# EAGLE board ATMega328-1.0 (EAGLE 6.4)
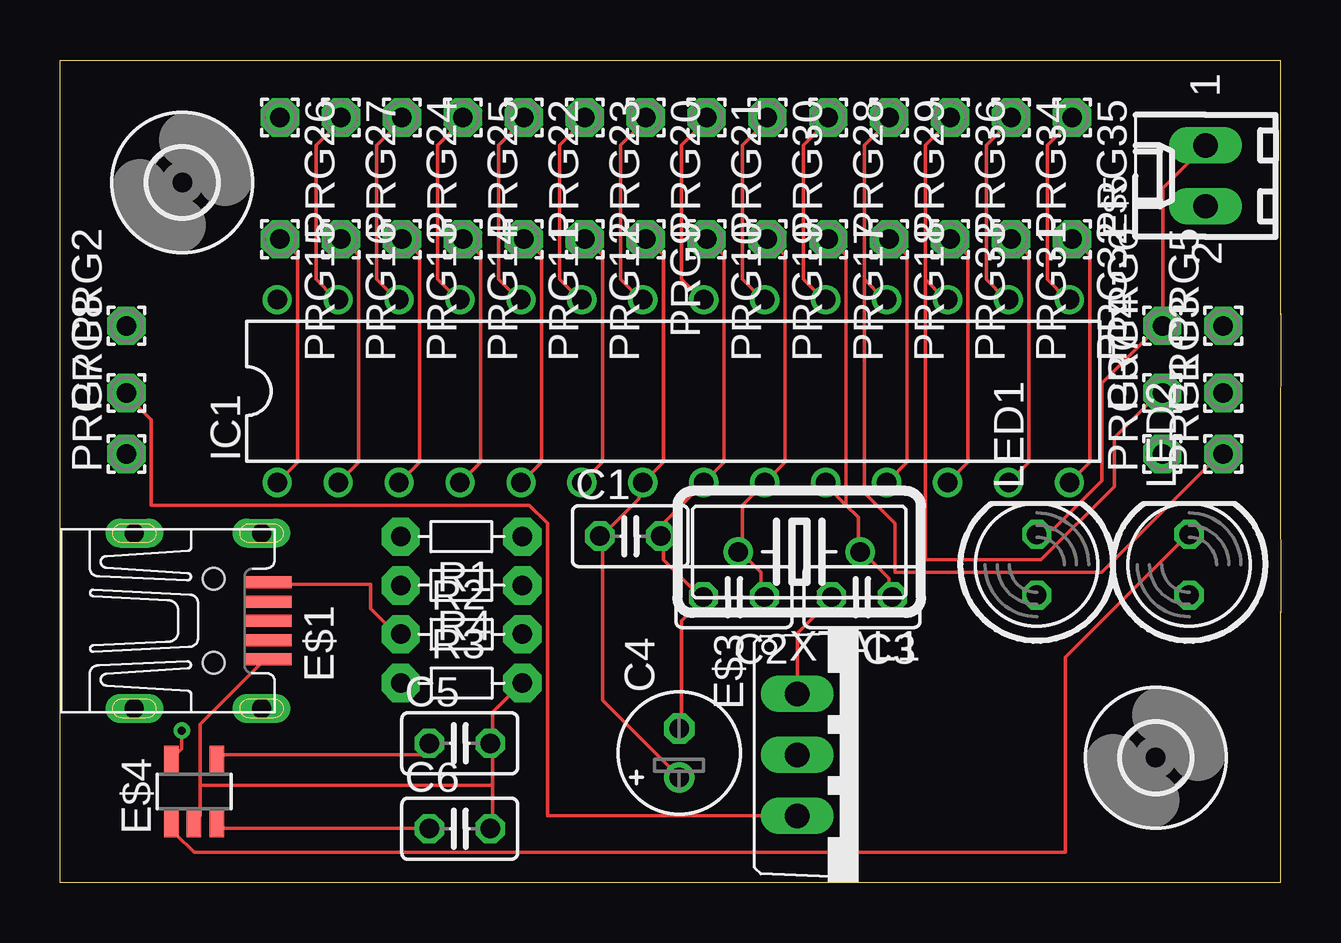
[diagram p0: board, top side]
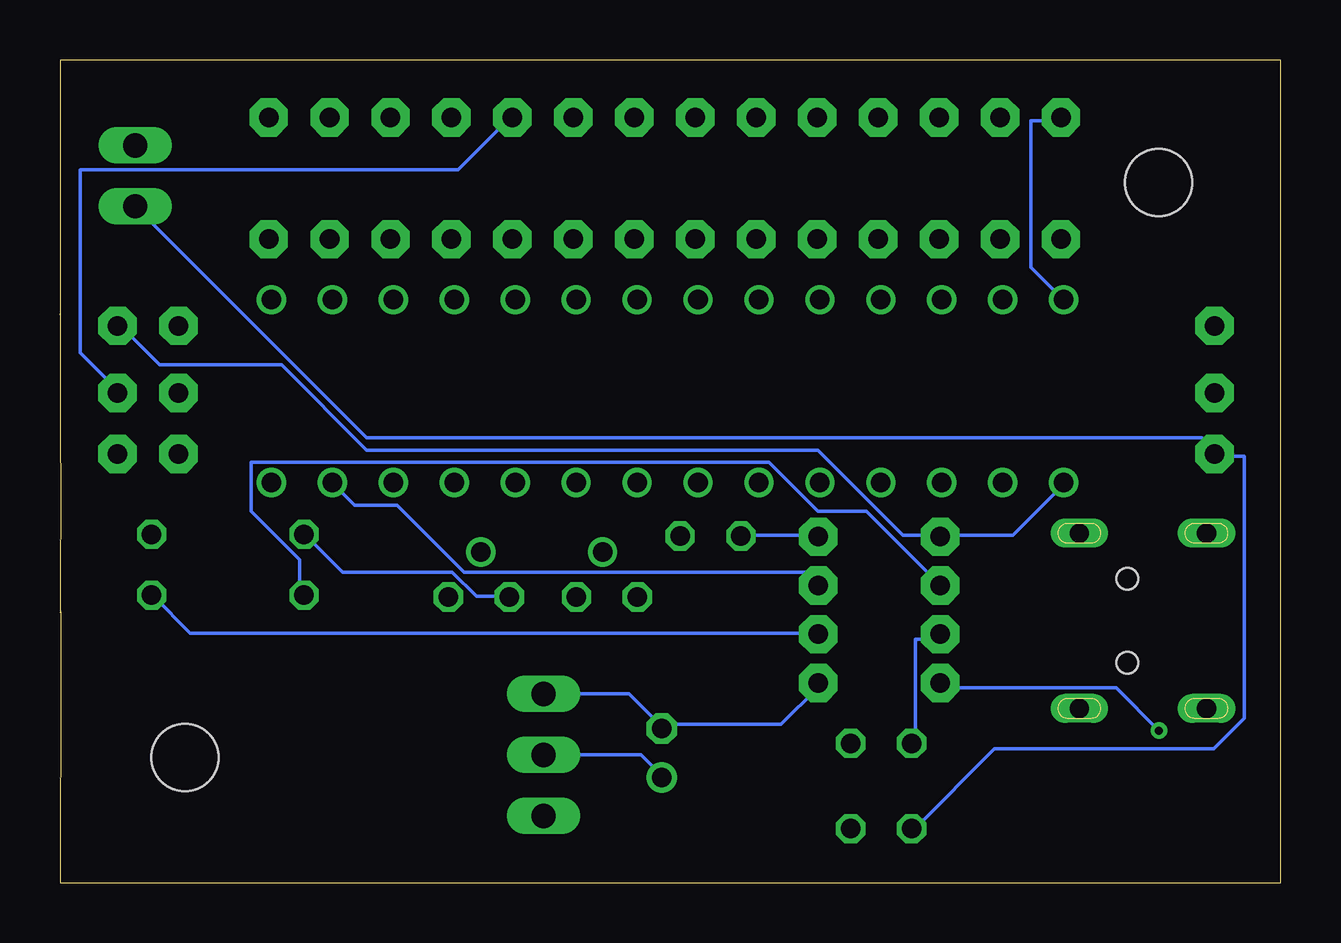
[diagram p1: board, bottom side, seen from below]

Size 50.89 x 34.29 mm. Coordinates in mm from the lower left corner, seen from the top.
Outline: 0,0 0,20.43 0.01,20.46 0.01,22.51 0,23.6 0,34.29 50.87,34.29 50.87,23.67 50.88,23.72 50.89,20.7 50.87,20.66 50.86,14.34 50.88,14.29 50.88,11.25 50.86,11.3 50.86,8.78 50.87,0 0,0
Copper layers (1*16): Top 0.0356mm / dielectric 1.5011mm / Bottom 0.0356mm
Design rules "LaenPCBOrder": minimum track width 6mil, minimum drill 13mil, track to track 6mil, track to pad 6mil, pad to pad 6mil, via to via 6mil, smd to smd 6mil, copper to edge 15mil, drill to drill 6mil, minimum pad ring 7mil, minimum via ring 7mil, stop-mask expansion 4mil, vias tented up to drill 0mil, thermal gap 10mil

## Footprints (pad centres in the part's own frame; a part is rotated, then mirrored left to right if it is on the bottom)
C025-025X050 = drill 0.813 octagon: 1 -1.27,0; 2 1.27,0
E2-5 = drill 0.813 pad 1.27: + -1.016,0 | drill 0.813 pad 1.27 octagon: - 1.016,0
UX60-MB-5S8 = smd 2 x 0.5: 1 8.65,1.6; 2 8.65,0.8; 3 8.65,0; 4 8.65,-0.8; 5 8.65,-1.6 | drill 0.8 long: M1 3.1,-3.65; M2 3.1,3.65; M3 8.4,3.65; M4 8.4,-3.65 | hole 0.9: 6.4,-1.75; 6.4,1.75
2,8 = hole 2.8: 0,0
TO220V = drill 1.016 long: 1 -2.54,-2.54; 2 0,-2.54; 3 2.54,-2.54
SOT23-5 = smd 0.6 x 1.2: 1 -0.95,-1.306; 2 0,-1.306; 3 0.95,-1.306; 4 0.95,1.306; 5 -0.95,1.306
6410-02 = drill 1.016 long: 1 1.27,0; 2 -1.27,0
PDIP-T28 = drill 0.813 pad 1.2: 1 -16.51,-3.81; 2 -13.97,-3.81; 3 -11.43,-3.81; 4 -8.89,-3.81; 5 -6.35,-3.81; 6 -3.81,-3.81; 7 -1.27,-3.81; 8 1.27,-3.81; 9 3.81,-3.81; 10 6.35,-3.81; 11 8.89,-3.81; 12 11.43,-3.81; 13 13.97,-3.81; 14 16.51,-3.81; 15 16.51,3.81; 16 13.97,3.81; 17 11.43,3.81; 18 8.89,3.81; 19 6.35,3.81; 20 3.81,3.81; 21 1.27,3.81; 22 -1.27,3.81; 23 -3.81,3.81; 24 -6.35,3.81; 25 -8.89,3.81; 26 -11.43,3.81; 27 -13.97,3.81; 28 -16.51,3.81
LED5MM = drill 0.813 octagon: A -1.27,0; K 1.27,0
1,6/0,8 = drill 0.813 pad 1.6 octagon: 1 0,0
R-5 = drill 0.813 pad 1.6 octagon: 1 -2.54,0; 2 2.54,0
HC18U-V = drill 0.813: 1 -2.54,0; 2 2.54,0

## Placement (x,y rotation side)
C1  [C025-025X050]  23.77,14.45 0 top
C2  [C025-025X050]  28.09,11.91 180 top
C3  [C025-025X050]  33.43,11.91 180 top
C4  [E2-5]  25.81,5.41 90 top
C5  [C025-025X050]  16.66,5.82 0 top
C6  [C025-025X050]  16.66,2.26 0 top
E$1  [UX60-MB-5S8]  0,10.92 0 top
E$2  [2,8]  5.1,29.18 0 top
E$3  [TO220V]  33.27,5.33 270 top
E$4  [SOT23-5]  5.59,3.81 0 top
E$5  [6410-02]  47.75,29.46 90 top
E$14  [2,8]  45.68,5.22 0 top
IC1  [PDIP-T28]  25.57,20.49 0 top
LED1  [LED5MM]  40.72,13.26 90 top
LED2  [LED5MM]  47.07,13.26 90 top
PRG1  [1,6/0,8]  48.49,17.88 90 top
PRG2  [1,6/0,8]  2.77,23.22 90 top
PRG3  [1,6/0,8]  48.49,20.42 90 top
PRG4  [1,6/0,8]  45.95,20.42 90 top
PRG5  [1,6/0,8]  48.49,23.22 90 top
PRG6  [1,6/0,8]  45.95,23.22 90 top
PRG7  [1,6/0,8]  2.77,17.88 90 top
PRG8  [1,6/0,8]  2.77,20.42 90 top
PRG9  [1,6/0,8]  24.41,26.82 270 top
PRG10  [1,6/0,8]  26.95,26.82 270 top
PRG11  [1,6/0,8]  19.33,26.82 270 top
PRG12  [1,6/0,8]  21.87,26.82 270 top
PRG13  [1,6/0,8]  14.25,26.82 270 top
PRG14  [1,6/0,8]  16.79,26.82 270 top
PRG15  [1,6/0,8]  9.17,26.82 270 top
PRG16  [1,6/0,8]  11.71,26.82 270 top
PRG17  [1,6/0,8]  32.03,26.82 270 top
PRG18  [1,6/0,8]  34.57,26.82 270 top
PRG19  [1,6/0,8]  29.49,26.82 270 top
PRG20  [1,6/0,8]  24.41,31.9 270 top
PRG21  [1,6/0,8]  26.95,31.9 270 top
PRG22  [1,6/0,8]  19.33,31.9 270 top
PRG23  [1,6/0,8]  21.87,31.9 270 top
PRG24  [1,6/0,8]  14.25,31.9 270 top
PRG25  [1,6/0,8]  16.79,31.9 270 top
PRG26  [1,6/0,8]  9.17,31.9 270 top
PRG27  [1,6/0,8]  11.71,31.9 270 top
PRG28  [1,6/0,8]  32.03,31.9 270 top
PRG29  [1,6/0,8]  34.57,31.9 270 top
PRG30  [1,6/0,8]  29.49,31.9 270 top
PRG31  [1,6/0,8]  39.65,26.82 270 top
PRG32  [1,6/0,8]  42.19,26.82 270 top
PRG33  [1,6/0,8]  37.11,26.82 270 top
PRG34  [1,6/0,8]  39.65,31.9 270 top
PRG35  [1,6/0,8]  42.19,31.9 270 top
PRG36  [1,6/0,8]  37.11,31.9 270 top
PRG37  [1,6/0,8]  45.95,17.88 90 top
R1  [R-5]  16.74,14.43 180 top
R2  [R-5]  16.74,10.36 0 top
R3  [R-5]  16.74,8.33 0 top
R4  [R-5]  16.74,12.4 180 top
XTAL1  [HC18U-V]  30.81,13.79 180 top

## Library data of the parts
C1-C3 C5 C6 = resistor
C4 = rcl
E$1 = con-hirose
E$2 E$14 = holes
E$3 E$4 = linear
E$5 = con-molex
IC1 = texas
LED1 LED2 = led
PRG1-PRG37 = wirepad
R1-R4 = discrete
XTAL1 = crystal

## Nets
S$2: C1.2 C2.2 C3.2 C4.- C5.2 C6.2 E$1.5 E$3.1 E$4.2 E$5.1 IC1.8 LED1.K PRG6.1 PRG10.1 R3.2
S$3: E$4.1 LED2.K
S$4: IC1.26 PRG24.1
S$5: IC1.13 PRG31.1 R4.1
S$6: C2.1 IC1.9 PRG19.1 XTAL1.2
S$7: C3.1 IC1.10 PRG17.1 XTAL1.1
S$8: IC1.1 PRG5.1 PRG15.1 R1.2
S$9: IC1.18 PRG1.1 PRG29.1
S$10: C1.1 C4.+ E$3.2 IC1.7 PRG9.1 R1.1
S$11: IC1.15 PRG35.1
S$12: IC1.19 PRG3.1 PRG28.1
S$13: IC1.17 PRG4.1 PRG36.1
S$14: IC1.14 PRG32.1
S$15: IC1.16 PRG34.1
S$16: IC1.4 PRG14.1
S$17: IC1.28 PRG26.1
S$18: IC1.5 PRG11.1
S$19: IC1.27 PRG27.1
S$20: E$3.3 PRG8.1
S$21: IC1.2 PRG16.1
S$22: LED1.A R4.2
S$23: IC1.3 PRG13.1
S$24: IC1.6 PRG12.1
S$25: IC1.11 PRG18.1
S$26: IC1.12 PRG33.1
S$27: IC1.25 PRG25.1
S$28: IC1.24 PRG22.1
S$29: IC1.23 PRG23.1
S$30: IC1.22 PRG20.1
S$31: IC1.21 PRG21.1
S$32: IC1.20 PRG30.1
S$33: LED2.A R2.2
S$34: C6.1 E$4.3 E$5.2 PRG7.1
S$35: C5.1 E$1.1 E$4.4 R2.1
S$36: E$4.5 R3.1

## Tracks (layer width: path | path; a pad name or v marks a point on that pad's centre or on a via)
S$2
  Top 0.152: 5.84,4.06 5.84,6.6 8.64,9.4 E$1.5 | 5.84,4.06 5.84,2.79 5.59,2.54 E$4.2 | 18.03,4.06 18.03,5.59 C5.2 18.03,5.84 18.03,7.11 19.05,8.13 R3.2 | 18.03,4.06 18.03,2.29 C6.2 | 18.03,4.06 5.84,4.06 | PRG10.1 27.18,26.67 27.69,26.16 27.69,17.53 26.92,16.76 IC1.8 26.67,16.51 25.15,14.99 25.15,14.48 C1.2 25.15,14.22 25.15,13.46 26.67,11.94 C2.2 26.67,11.68 25.91,10.92 25.91,6.6 C4.- | E$5.1 45.97,28.96 45.97,23.37 PRG6.1 45.72,23.11 43.43,20.83 43.43,16.76 41.4,14.73 40.89,14.73 LED1.K | E$3.1 30.73,10.41 32,11.68 C3.2
  Bottom 0.152: LED1.K 40.64,14.48 39.12,12.95 34.54,12.95 33.53,11.94 32.26,11.94 C3.2 | E$3.1 27.18,7.87 25.91,6.6 C4.- 25.65,6.6 20.83,6.6 19.3,8.13 R3.2
S$3
  Top 0.152: E$4.1 4.83,2.29 4.83,2.03 5.59,1.27 41.91,1.27 41.91,9.4 46.99,14.48 LED2.K
S$4
  Top 0.152: IC1.26 13.97,24.38 13.21,25.15 13.21,30.73 14.22,31.75 PRG24.1
S$5
  Top 0.152: IC1.13 39.62,16.76 40.39,17.53 40.39,26.16 39.88,26.67 PRG31.1
  Bottom 0.152: R4.1 19.3,12.45 19.81,12.95 34.04,12.95 36.83,15.75 38.61,15.75 39.37,16.51 IC1.13
S$6
  Top 0.152: C2.1 29.21,11.94 29.21,12.95 28.45,13.72 XTAL1.2 28.45,13.97 28.45,15.75 29.21,16.51 IC1.9 29.46,16.76 30.23,17.53 30.23,26.16 29.72,26.67 PRG19.1
S$7
  Top 0.152: C3.1 34.54,11.94 34.54,12.7 33.53,13.72 XTAL1.1 33.27,13.97 33.27,15.24 32.77,15.75 | 32.77,15.75 32,16.51 IC1.10 | 32.77,15.75 32.77,26.16 32.26,26.67 PRG17.1
S$8
  Top 0.152: PRG15.1 9.4,26.67 9.91,26.16 9.91,17.53 9.14,16.76 IC1.1
  Bottom 0.152: IC1.1 9.14,16.51 11.18,14.48 13.97,14.48 R1.2 14.22,14.48 15.75,14.48 19.3,18.03 38.1,18.03 41.66,21.59 46.74,21.59 48.26,23.11 PRG5.1
S$9
  Top 0.152: 33.53,25.15 34.29,24.38 IC1.18 | 33.53,25.15 33.53,30.73 34.54,31.75 PRG29.1 | 33.53,25.15 33.53,16.26 34.8,14.99 34.8,12.95 43.43,12.95 48.26,17.78 PRG1.1
S$10
  Top 0.152: PRG9.1 24.64,26.67 25.15,26.16 25.15,17.53 24.38,16.76 IC1.7 24.13,16.51 24.13,16 22.61,14.48 C1.1 22.61,14.22 22.61,7.62 25.65,4.57 C4.+
  Bottom 0.152: E$3.2 26.67,5.33 25.91,4.57 C4.+ | R1.1 19.3,14.48 22.35,14.48 C1.1
S$11
  Top 0.152: IC1.15 41.91,24.38 41.15,25.15 41.15,30.73 42.16,31.75 PRG35.1
S$12
  Top 0.152: IC1.19 31.75,24.38 30.99,25.15 30.99,30.73 32,31.75 PRG28.1
  Bottom 0.152: PRG3.1 48.51,20.57 50.04,22.1 50.04,29.72 34.29,29.72 32.26,31.75 PRG28.1
S$13
  Top 0.152: 36.07,25.15 36.83,24.38 IC1.17 | 36.07,25.15 36.07,30.73 37.08,31.75 PRG36.1 | 36.07,25.15 36.07,13.46 40.89,13.46 43.94,16.51 43.94,18.54 45.72,20.32 PRG4.1
S$14
  Top 0.152: IC1.14 42.16,16.76 42.93,17.53 42.93,26.16 42.42,26.67 PRG32.1
S$15
  Top 0.152: IC1.16 39.37,24.38 38.61,25.15 38.61,30.73 39.62,31.75 PRG34.1
S$16
  Top 0.152: IC1.4 16.76,16.76 17.53,17.53 17.53,26.16 17.02,26.67 PRG14.1
S$17
  Bottom 0.152: IC1.28 9.14,24.38 10.41,25.65 10.41,31.75 9.4,31.75 PRG26.1
S$18
  Top 0.152: IC1.5 19.3,16.76 20.07,17.53 20.07,26.16 19.56,26.67 PRG11.1
S$19
  Top 0.152: IC1.27 11.43,24.38 10.67,25.15 10.67,30.73 11.68,31.75 PRG27.1
S$20
  Top 0.152: E$3.3 20.32,2.79 20.32,14.99 19.56,15.75 3.81,15.75 3.81,19.3 2.79,20.32 PRG8.1
S$21
  Top 0.152: IC1.2 11.68,16.76 12.45,17.53 12.45,26.16 11.94,26.67 PRG16.1
S$22
  Bottom 0.152: LED1.A 40.89,12.19 40.89,13.46 42.93,15.49 42.93,17.53 21.34,17.53 19.3,15.49 17.27,15.49 14.22,12.45 R4.2
S$23
  Top 0.152: IC1.3 14.22,16.76 14.99,17.53 14.99,26.16 14.48,26.67 PRG13.1
S$24
  Top 0.152: IC1.6 21.84,16.76 22.61,17.53 22.61,26.16 22.1,26.67 PRG12.1
S$25
  Top 0.152: IC1.11 34.54,16.76 35.31,17.53 35.31,26.16 34.8,26.67 PRG18.1
S$26
  Top 0.152: IC1.12 37.08,16.76 37.85,17.53 37.85,26.16 37.34,26.67 PRG33.1
S$27
  Top 0.152: IC1.25 16.51,24.38 15.75,25.15 15.75,30.73 16.76,31.75 PRG25.1
S$28
  Top 0.152: IC1.24 19.05,24.38 18.29,25.15 18.29,30.73 19.3,31.75 PRG22.1
S$29
  Top 0.152: IC1.23 21.59,24.38 20.83,25.15 20.83,30.73 21.84,31.75 PRG23.1
S$30
  Top 0.152: IC1.22 24.13,24.38 23.37,25.15 23.37,30.73 24.38,31.75 PRG20.1
S$31
  Top 0.152: IC1.21 26.67,24.38 25.91,25.15 25.91,30.73 26.92,31.75 PRG21.1
S$32
  Top 0.152: IC1.20 29.21,24.38 28.45,25.15 28.45,30.73 29.46,31.75 PRG30.1
S$33
  Bottom 0.152: LED2.A 46.99,11.94 45.47,10.41 19.3,10.41 R2.2
S$34
  Top 0.152: E$4.3 6.6,2.29 15.24,2.29 C6.1
  Bottom 0.152: E$5.2 38.1,18.54 3.3,18.54 2.79,18.03 PRG7.1 2.54,17.78 1.52,17.78 1.52,6.86 2.79,5.59 11.94,5.59 15.24,2.29 C6.1
S$35
  Top 0.152: E$4.4 6.6,5.33 15.24,5.33 15.24,5.59 C5.1 | E$1.1 8.89,12.45 12.95,12.45 12.95,11.43 13.97,10.41 R2.1
  Bottom 0.152: C5.1 15.24,5.84 15.24,10.16 14.22,10.16 R2.1
S$36  (via drill 0.33)
  Top 0.152: v5.08,6.35 5.08,5.59 4.83,5.33 E$4.5
  Bottom 0.152: v5.08,6.35 6.86,8.13 13.97,8.13 R3.1

## Text on the board
tNames: + | ATmega328 | PWRSW | ICSP | 16MHz | 1 | 4.7K | 0.1uF | 330 | + | + | 330 | 22pF | 22pF | PD7 | CHG | 2K | 4.7uF | 100uF | MCP73831 | 4.7uF | VREG